# EAGLE board Maya Ayoub Custom Layout v29 (EAGLE 9.7.0)
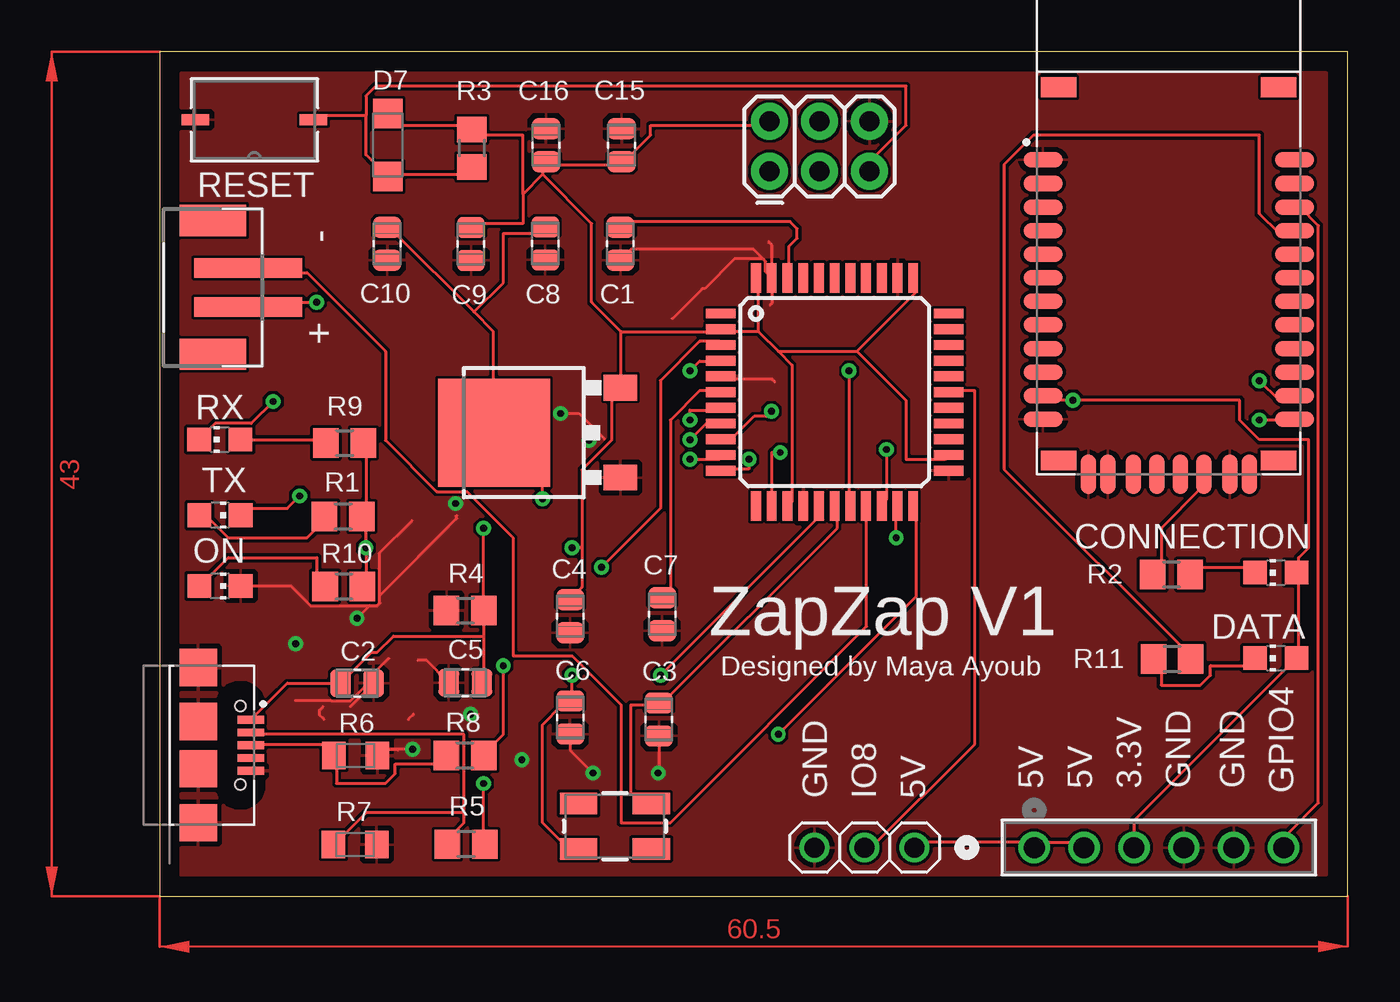
[diagram p0: board, top side]
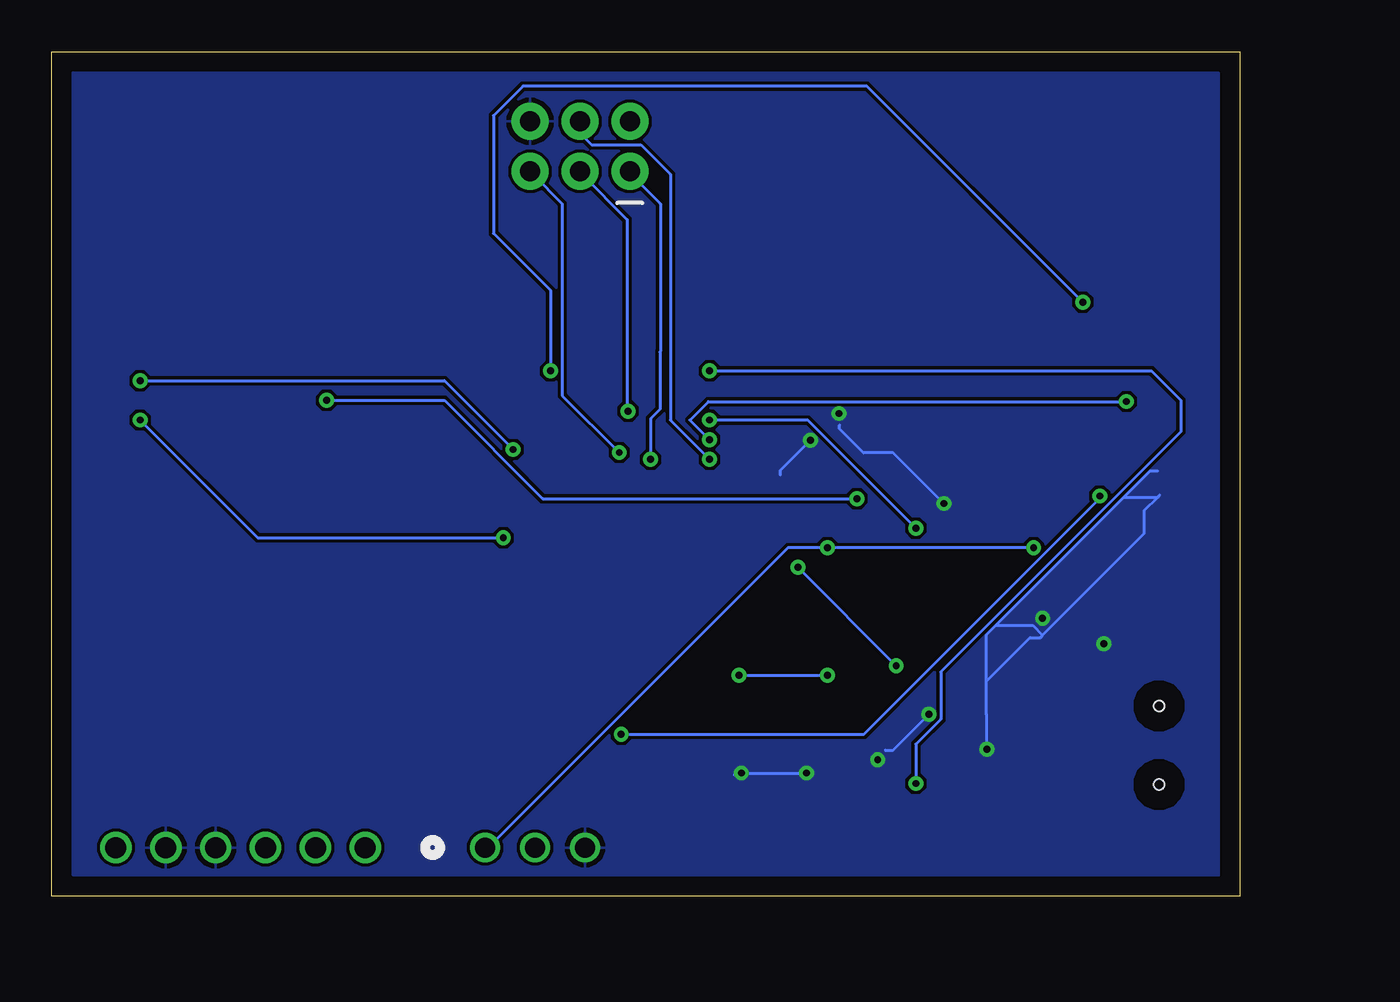
[diagram p1: board, bottom side, seen from below]

Size 60.5 x 43.01 mm. Coordinates in mm from the lower left corner, seen from the top.
Outline: 0,0 60.5,0.01 60.5,43.01 0,43 0,0
Copper layers (1*16): Top 0.035mm / dielectric 1.5mm / Bottom 0.035mm
Design rules "default": minimum track width 6mil, minimum drill 0.35mm, track to track 6mil, track to pad 6mil, pad to pad 6mil, via to via 6mil, smd to smd 6mil, copper to edge 40mil, drill to drill 6mil, minimum pad ring 10mil, minimum via ring 8mil, stop-mask expansion 4mil, vias tented up to drill 0mil, thermal gap 10mil

## Footprints (pad centres in the part's own frame; a part is rotated, then mirrored left to right if it is on the bottom)
CAP_0805 = smd 1.05 x 1.38: 1 -0.84,0; 2 0.84,0
JST-PH-2-SMT = smd 1 x 5.5: 1 -1,-1.8; 2 1,-1.8 | smd 1.6 x 3.4: NC1 -3.4,0; NC2 3.4,0
CHIP-LED0805 = smd 1.2 x 1.2: A 0,-1.05; C 0,1.05
LED-1206 = smd 1.5 x 1.5: + -1.6,0; - 1.6,0
TO252 = smd 1.3 x 1.7: 1 -2.285,-4.22; 2 2.285,-4.22 | smd 5.5 x 5.7: 3 0,2.22
2X3 = drill 1.016 pad 1.88: 1 0,0; 2 0,2.54; 3 2.54,0; 4 2.54,2.54; 5 5.08,0; 6 5.08,2.54
CUI_UJ2-MIBH-G-SMT-TR = smd 0.4 x 1.35: 1 -1.3,2.675; 2 -0.65,2.675; 3 0,2.675; 4 0.65,2.675; 5 1.3,2.675 | smd 1.9 x 1.9: S1 -3.95,0; S2 -1.2,0; S3 1.2,0; S4 3.95,0 | hole 0.55: -2,2.15; 2,2.15
CONN6_061LFBN-RC_SUL = drill 1.067 pad 1.321: 1 0,0; 2 2.54,0; 3 5.08,0; 4 7.62,0; 5 10.16,0; 6 12.7,0
1X03 = drill 1.016: 1 -2.54,0; 2 0,0; 3 2.54,0
R0805 = smd 1.3 x 1.5: 1 -0.95,0; 2 0.95,0
CT/CN0805 = smd 1.2 x 1.4: 1 -1.1,0; 2 1.1,0
SW_PTS636_SK25J_SMTR_LFS_CNK = smd 1.397 x 0.559: 1 -3.006,0; 2 3.006,0
TQFP44 = smd 1.5 x 0.5: 1 -5.8,4; 2 -5.8,3.2; 3 -5.8,2.4; 4 -5.8,1.6; 5 -5.8,0.8; 6 -5.8,0; 7 -5.8,-0.8; 8 -5.8,-1.6; 9 -5.8,-2.4; 10 -5.8,-3.2; 11 -5.8,-4; 23 5.8,-4; 24 5.8,-3.2; 25 5.8,-2.4; 26 5.8,-1.6; 27 5.8,-0.8; 28 5.8,0; 29 5.8,0.8; 30 5.8,1.6; 31 5.8,2.4; 32 5.8,3.2; 33 5.8,4 | smd 0.5 x 1.5: 12 -4,-5.8; 13 -3.2,-5.8; 14 -2.4,-5.8; 15 -1.6,-5.8; 16 -0.8,-5.8; 17 0,-5.8; 18 0.8,-5.8; 19 1.6,-5.8; 20 2.4,-5.8; 21 3.2,-5.8; 22 4,-5.8; 34 4,5.8; 35 3.2,5.8; 36 2.4,5.8; 37 1.6,5.8; 38 0.8,5.8; 39 0,5.8; 40 -0.8,5.8; 41 -1.6,5.8; 42 -2.4,5.8; 43 -3.2,5.8; 44 -4,5.8
XCVR_RN42-I/RM = smd 2 x 0.8: 1 -6.4,6.6; 2 -6.4,5.4; 3 -6.4,4.2; 4 -6.4,3; 5 -6.4,1.8; 6 -6.4,0.6; 7 -6.4,-0.6; 8 -6.4,-1.8; 9 -6.4,-3; 10 -6.4,-4.2; 11 -6.4,-5.4; 12 -6.4,-6.6; 13 6.4,-6.6; 14 6.4,-5.4; 15 6.4,-4.2; 16 6.4,-3; 17 6.4,-1.8; 18 6.4,-0.6; 19 6.4,0.6; 20 6.4,1.8; 21 6.4,3; 22 6.4,4.2; 23 6.4,5.4; 24 6.4,6.6 | smd 0.8 x 2: 28 3.1,-9.4; 29 -3.1,-9.4; 30 4.1,-9.4; 31 1.8,-9.4; 32 0.6,-9.4; 33 -0.6,-9.4; 34 -1.8,-9.4; 35 -4.1,-9.4 | smd 1.8 x 1: S1 -5.6,-8.7; S2 5.6,-8.7; S3 5.6,10.3; S4 -5.6,10.3
CRYSTAL-SMD-5X3.2-4PAD = smd 1.9 x 1.1: 1 -1.85,-1.15; 2 1.85,-1.15; 3 1.85,1.15; 4 -1.85,1.15

## Placement (x,y rotation side)
C1  0.1uF 0805  [CAP_0805]  23.46,33.23 90 top
C2  22uF 0805  [CAP_0805]  10.06,10.86 180 top
C3  18pF 0805  [CAP_0805]  25.42,9.01 270 top
C4  1uF 0805  [CAP_0805]  20.9,14.26 90 top
C5  0.1uF 0805  [CAP_0805]  15.56,10.88 0 top
C6  18pF 0805  [CAP_0805]  20.9,9.11 270 top
C7  1uF 0805  [CAP_0805]  25.59,14.37 270 top
C8  22uF 0805  [CAP_0805]  19.64,33.24 90 top
C9  10uF 0805  [CAP_0805]  15.85,33.21 90 top
C10  0.1uF 0805  [CAP_0805]  11.58,33.22 90 top
C15  0.1uF 0805  [CAP_0805]  23.52,38.24 90 top
C16  0.1uF 0805  [CAP_0805]  19.67,38.24 90 top
CN1  [JST-PH-2-SMT]  2.72,31 90 top
CONNECTION  GREEN 0805  [CHIP-LED0805]  56.83,16.48 90 top
D7  SMD-DIODE-SWITCHING-75V-150MA(D1206)  [LED-1206]  11.63,38.25 90 top
DATA  RED 0805  [CHIP-LED0805]  56.83,12.13 90 top
IC1  LM1117DT-3.3  [TO252]  19.24,23.61 90 top
J1  AVR_SPI_PROG_3X2PTH  [2X3]  31.06,36.91 0 top
J2  UJ2-MIBH-G-SMT-TR  [CUI_UJ2-MIBH-G-SMT-TR]  1.97,7.7 270 top
J3  PPTC061LFBN-RCCONN6_061LFBN-RC_SUL  [CONN6_061LFBN-RC_SUL]  44.53,2.49 0 top
JP1  [1X03]  35.89,2.49 0 top
ON  ONGREEN 0805  [CHIP-LED0805]  3.08,15.8 270 top
R1  1k 0805  [R0805]  9.34,19.34 0 top
R2  470Ohms 0805  [R0805]  51.52,16.39 0 top
R3  10kOhms 0805  [R0805]  15.89,38.09 270 top
R4  10k 0805  [R0805]  15.56,14.56 0 top
R5  22Ohms 0805  [R0805]  15.6,2.66 180 top
R6  VARISTORCN0805  [CT/CN0805]  9.98,7.17 180 top
R7  VARISTORCN0805  [CT/CN0805]  9.96,2.64 180 top
R8  22Ohms 0805  [R0805]  15.55,7.16 180 top
R9  1k 0805  [R0805]  9.42,23.08 0 top
R10  1k 0805  [R0805]  9.38,15.78 0 top
R11  470Ohms 0805  [R0805]  51.55,12.08 180 top
RESET  SPST  [SW_PTS636_SK25J_SMTR_LFS_CNK]  4.82,39.53 180 top
RX  RXYellow  [CHIP-LED0805]  3.06,23.26 90 top
TX  TXYellow  [CHIP-LED0805]  3.08,19.4 270 top
U1  32U4  [TQFP44]  34.37,25.67 0 top
U2  RN42-I/RM  [XCVR_RN42-I/RM]  51.38,30.89 0 top
Y1  16MHz  [CRYSTAL-SMD-5X3.2-4PAD]  23.18,3.57 0 top

## Library data of the parts
C1-C10 C15 C16 = Resistor_Capacitor; CREATED_BY: PCBLayout.com; DIGIKEY_PART_NUMBER: 311-1140-2-ND; MANUFACTURER: Yageo; MPN: CC0805KRX7R9BB104; PACKAGE: SMD 0805
CN1 JP1 = adafruit
CONNECTION DATA ON RX TX = led
D7 = SMD-DIODE-SWITCHING-75V-150MA_D1206_; AVAILABILITY: Warning; DESCRIPTION: Diode Standard 100V 150mA Surface Mount 1206; MF: Bourns; MP: CD1206-S01575; PACKAGE: 1206 Bourns; PRICE: None
IC1 = lm1117_10; MF: Texas Instruments; MPN: LM1117DT-3.3; OC_FARNELL: 1469048; OC_NEWARK: 41K3430
J1 = SparkFun-Connectors
J2 = UJ2-MIBH-G-SMT-TR; CUI_PURCHASE_URL: https://www.cuidevices.com/product/interconnect/connectors/usb-connectors/uj2-mibh-g-smt-tr?utm_source=snapeda.com&utm_medium=referral&utm_campaign=snapedaBOM; DESCRIPTION: Micro B, USB 2.0, 1.8 A, Right Angle, Surface Mount (SMT), USB Receptacle; DIGI-KEY_PART_NUMBER: 2223-UJ2-MIBH-G-SMT-TRCT-ND; MF: CUI Devices; MP: UJ2-MIBH-G-SMT-TR; PACKAGE: None; PURCHASE-URL: https://pricing.snapeda.com/search/part/UJ2-MIBH-G-SMT-TR/?ref=eda
J3 = 2021-10-12_06-33-55_Library; COPYRIGHT: Copyright (C) 2021 Ultra Librarian. All rights reserved.; DIGI-KEY_PART_NUMBER_1: S7004-ND; MANUFACTURER_PART_NUMBER: PPTC061LFBN-RC; MFR_NAME: Sullins
R1-R5 R8-R11 = rcl; SPICEPREFIX: R
R6 R7 = varistor
RESET = 2021-10-08_06-17-12_Library; COPYRIGHT: Copyright (C) 2021 Ultra Librarian. All rights reserved.; DIGI-KEY_PART_NUMBER_1: CKN12326-2-ND; DIGI-KEY_PART_NUMBER_2: CKN12326-1-ND; DIGI-KEY_PART_NUMBER_3: CKN12326-6-ND; MANUFACTURER_PART_NUMBER: PTS636 SK25J SMTR LFS; MFR_NAME: C&K
U1 = SparkFun-IC-Microcontroller; PROD_ID: IC-11161; SPICEPREFIX: X
U2 = RN42-I_RM; AVAILABILITY: In Stock; DESCRIPTION: Bluetooth Bluetooth v2.1 +EDR Transceiver Module 2.4GHz Integrated, Trace Surface Mount; MF: Microchip; MP: RN42-I/RM; PACKAGE: None; PRICE: None; PURCHASE-URL: https://pricing.snapeda.com/search/part/RN42-I/RM/?ref=eda
Y1 = SparkFun-Clocks; PROD_ID: XTAL-08218; SF_ID: COM-00094

## Nets
A0: U1.36
A1: U1.37
A2: U1.38
A3: U1.39
A4: U1.40
A5: U1.41
D2/SDA: CN1.2 U1.19
D3/SCL: CN1.1 U1.18
D4: U1.25
D5*: U1.31
D6*: U1.27
D7: U1.1
GND: C1.1 C2.1 C3.2 C4.1 C5.1 C6.2 C7.2 C8.1 C9.1 C10.1 C15.2 C16.2 IC1.1 J1.6 J2.5 J2.S1 J2.S2 J2.S3 J2.S4 J3.4 J3.5 JP1.1 ON.C R4.1 R6.1 R7.1 RESET.2 U1.5 U1.15 U1.23 U1.35 U1.43 U2.1 U2.12 U2.28 U2.29 U2.35
GPIO4: J3.6 U2.22
IO8: JP1.2 U1.28
IO9*: U1.29
IO10*: U1.30
IO11*: U1.12
IO12: U1.26
IO13*: U1.32
MISO: J1.1 U1.11
MOSI: J1.4 U1.10
N$1: J2.2 R5.2 R7.2
N$2: J2.3 R6.2 R8.2
N$3: R2.1 U2.31
N$4: R11.1 U2.21
N$5: C1.2 U1.42
N$6: C7.1 U1.6
N$7: DATA.C R11.2
N$8: CONNECTION.C R2.2
N$10: R1.1 TX.A
N$11: ON.A R10.1
N$12: R9.1 RX.A
RD+: R5.1 U1.4
RD-: R8.1 U1.3
RESET: D7.+ J1.5 R3.2 RESET.1 U1.13
RXLED: RX.C U1.8
SCK: J1.3 U1.9
TXLED: TX.C U1.22
UART_RX: U1.21 U2.13
UART_TX: U1.20 U2.14
VCC: C4.2 C9.2 C15.1 C16.1 D7.- IC1.2 J1.2 J3.1 J3.2 JP1.3 R1.2 R3.1 R9.2 R10.2 U1.2 U1.14 U1.24 U1.34 U1.44
VCC_2: C8.2 C10.2 CONNECTION.A DATA.A IC1.3 J3.3 U2.11
VUSB: C2.2 C5.2 J2.1 R4.2 U1.7
XTAL1: C3.1 U1.17 Y1.3
XTAL2: C6.1 U1.16 Y1.1

## Tracks (layer width: path | path; a pad name or v marks a point on that pad's centre or on a via)
D2/SDA
  Top 0.152: U1.19 36,19.75 36,13.75 26,3.75 23.5,3.75 23.5,9.75 21,12.25 18,12.25 18,18.25 15.64,20.61 14.1,20.61 11.5,23.21 11.5,27.75 7.5,31.75 5,31.75 CN1.2
D3/SCL  (via drill 0.35)
  Top 0.152: v8,30.25 5,30.25 CN1.1 | v35.11,26.75 35.11,19.93 U1.18
  Bottom 0.152: v8,30.25 19,41.25 36.5,41.25 38,39.75 38,33.75 35.11,30.86 v35.11,26.75
GND  (via drill 0.35)
  Top 0.152: R6.1 11.36,7.46 12.12,7.46 | 11.35,10.41 C2.1 | 12.92,9.28 12.66,9.01 | v12.89,7.5 12.87,7.52 11.71,7.52 | 8.32,9.66 8.14,9.49 8.14,9.23 8.37,9.01 | 9.71,9.66 C2.1 | U1.43 31.17,33.17 31.01,33.33 | 31.33,26.2 31.18,26.34 28.7,26.34 U1.5 | U1.43 31.17,30.2 31.08,30.11 | 14.26,10.88 C5.1 13.59,12.01 13.14,12.01 | 30.71,32.45 30.23,32.94 24.01,32.94 C1.1 | 30.71,32.45 30.85,32.31 30.85,31.79 U1.43 | C6.2 20.9,7.44 v22.06,6.28 | C3.2 25.42,6.32 v25.39,6.28 | 11.07,14.8 11.2,14.94 | ON.C 6.68,15.8 7.68,14.8 11.07,14.8 | 12.84,19.13 11.2,17.49 11.2,14.94 | v15.84,9.28 16.19,9.28 16.2,9.27 | C2.1 10.61,10.86 9.69,9.94 8.75,9.94 8.72,9.96 6.91,9.96 | C2.1 10.9,11.36 11.66,12.12 | 26.11,29.41 27.64,30.94 27.76,30.94 29.27,32.45 30.71,32.45 | 15.13,19.39 15.13,19.24 11.2,15.31 11.2,14.94 | v10.04,14.15 10.69,14.8 11.07,14.8 | 11.07,14.8 11.2,14.94 | 22.65,23.3 21.35,24.59 v20.41,24.59
  Bottom 0.152: v12.89,7.5 12.89,9.25 12.9,9.26 | 12.9,9.26 12.92,9.28 | 25.76,6.18 25.66,6.28 v25.39,6.28 v22.06,6.28 | 12.9,9.26 12.9,10.95 | v15.84,9.28 17.66,7.45 18.07,7.45 | 12.9,10.95 12.9,13.33 12.43,13.8 | 12.43,13.8 5.9,20.33 | 5.9,20.33 5.83,20.39 5.11,21.12 4.57,21.66 4.19,21.66 | 4.18,20.33 4.86,19.65 4.86,18.48 10.04,13.3 | 5.9,20.33 4.18,20.33 | 4.18,20.33 4.09,20.42 | 12.9,10.95 10.68,13.17 10.17,13.17 10.04,13.3 | 12.43,13.8 10.55,13.8 10.04,13.3 | v15.07,20 17.65,22.58 19.16,22.58 20.38,23.81 20.38,23.99 | v21.87,23.21 23.41,21.68 23.41,21.45
  other vias: 18.44,6.97 6.92,12.87
  pour Top: 60.04,42.79 60.04,0.94 60.58,0.4 0.27,0.4 0.28,42.79
  pour Bottom: 60.33,42.88 60.33,0.53 0.72,0.53 0.36,0.17 0.36,42.75
GPIO4
  Top 0.152: J3.6 57.5,2.75 57.5,3.25 59.01,4.76 59.01,34.15 58.07,35.09 U2.22
IO8
  Top 0.152: U1.28 40.5,25.75 41.5,25.75 41.5,7.75 36,2.25 JP1.2
MISO  (via drill 0.35)
  Top 0.152: v30,22.25 30,21.75 29,21.75 U1.11
  Bottom 0.152: J1.1 31,36.75 29.5,35.25 29.5,27.75 29.53,27.72 29.53,24.8 30,24.33 v30,22.25
MOSI  (via drill 0.35)
  Top 0.152: v27,22.25 28.5,22.25 U1.10
  Bottom 0.152: v27,22.25 29,24.25 29,36.75 30.5,38.25 33,38.25 34,39.25 J1.4
N$1
  Top 0.152: 15.5,4.25 15.5,3.75 15,3.25 15,2.75 R5.2 | 15.5,4.25 15.5,8.25 5,8.25 J2.2 | 15.5,4.25 10.5,4.25 9,2.75 R7.2
N$2
  Top 0.152: J2.3 5,7.75 8.5,7.75 8.5,7.25 R6.2 9,6.75 9,5.75 11.5,5.75 12,6.25 12,6.75 14.5,6.75 R8.2
N$3
  Top 0.152: R2.1 51,16.75 51,18.75 53,20.75 53,21.25 U2.31
N$4
  Top 0.152: R11.1 52.5,12.25 43,21.75 43,37.25 44.5,38.75 56,38.75 56,34.75 57,33.75 57.5,33.75 U2.21
N$5
  Top 0.152: U1.42 32.06,31.56 32.06,33.1 32.45,33.5 32.45,34 32.1,34.35 23.75,34.35 C1.2
N$6
  Top 0.152: C7.1 26,15.25 26,24.25 27.5,25.75 28.5,25.75 U1.6
N$7
  Top 0.152: DATA.C 55.5,11.75 53.5,11.75 53.5,11.25 53,10.75 51,10.75 51,11.75 R11.2
N$8
  Top 0.152: CONNECTION.C 55.5,16.75 52.5,16.75 R2.2
N$10
  Top 0.152: TX.A 2.5,19.25 3.5,18.25 7.5,18.25 8,18.75 8,19.25 R1.1
N$11
  Top 0.152: ON.A 2.5,16.25 3.5,17.25 8,17.25 8,16.25 R10.1
N$12
  Top 0.152: RX.A 4.5,23.25 8,23.25 R9.1
RD+  (via drill 0.35)
  Top 0.152: v16.5,5.75 16.5,2.75 R5.1 | v27,26.75 27.5,27.25 28.5,27.25 U1.4
  Bottom 0.152: v27,26.75 4.5,26.75 3,25.25 3,23.66 15.23,11.43 15.23,9.02 16.5,7.76 v16.5,5.75
RD-  (via drill 0.35)
  Top 0.152: v17.5,11.75 17.5,8.25 16.5,7.25 R8.1 | v22.5,16.75 25.5,19.75 25.5,26.25 27.5,28.25 28.5,28.25 U1.3
  Bottom 0.152: v22.5,16.75 v17.5,11.75
RESET  (via drill 0.35)
  Top 0.152: 10.5,39.75 8,39.75 RESET.1 | 10.5,39.75 10.5,37.75 11.5,36.75 D7.+ 12,36.75 15.5,36.75 R3.2 | 10.5,39.75 10.5,40.75 11,41.25 38,41.25 38,39.25 36.5,37.75 36.5,37.25 J1.5 | v31.6,22.6 31.17,22.6 U1.13
  Bottom 0.152: J1.5 36,36.75 34.5,35.25 34.5,25.5 v31.6,22.6
RXLED  (via drill 0.35)
  Top 0.152: v27,23.25 28,24.25 28.5,24.25 U1.8 | v5.77,25.19 4.67,24.09 2.84,24.09 RX.C
  Bottom 0.152: v5.77,25.19 27.06,25.19 28,24.25 v27,23.25
SCK  (via drill 0.35)
  Top 0.152: U1.9 29,23.25 29.07,23.25 30.26,24.44 30.89,24.44 v31.15,24.7
  Bottom 0.152: v31.15,24.7 31.2,24.75 31.2,34.45 33.5,36.75 J1.3
TXLED  (via drill 0.35)
  Top 0.152: v31.5,8.25 38.5,15.25 38.5,19.75 U1.22 | TX.C 4.5,19.75 6.5,19.75 v7.13,20.38
  Bottom 0.152: v31.5,8.25 19.14,8.25 7.13,20.26 v7.13,20.38
UART_RX  (via drill 0.35)
  Top 0.152: v37.5,18.25 37.5,19.75 U1.21 | v56,24.25 57.5,24.25 U2.13
  Bottom 0.152: v37.5,18.25 50,18.25 v56,24.25
UART_TX  (via drill 0.35)
  Top 0.152: v37,22.75 37,20.25 U1.20 | v56,26.25 57,25.25 57.5,25.25 U2.14
  Bottom 0.152: v37,22.75 40.5,26.25 v56,26.25
VCC  (via drill 0.35)
  Top 0.152: D7.- 12,39.75 12,39.25 15.5,39.25 R3.1 16,38.75 18.5,38.75 18.5,35.75 | 18.5,35.75 18.5,34.25 16,34.25 C9.2 | 19.5,36.75 18.5,35.75 | 19.5,36.75 19.5,37.25 C16.1 20,37.25 23.5,37.25 C15.1 24,37.75 25,38.75 25,39.25 31,39.25 J1.2 | 30.5,28.75 29,28.75 U1.2 28.5,28.75 23.5,28.75 | 30.5,28.75 30.5,31.25 U1.44 | 30.5,28.75 31.5,27.75 | 35.5,27.75 38.5,30.75 38.5,31.25 U1.34 | 31.5,27.75 35.5,27.75 | 35.5,27.75 38,25.25 38,22.25 40,22.25 U1.24 | JP1.3 38.5,2.75 44.5,2.75 J3.1 45,2.75 47,2.75 J3.2 | R9.2 10.5,22.75 10.5,19.75 R1.2 10.5,19.25 v10.5,17.75 10.5,16.25 R10.2 | 21.5,17.75 21.5,15.75 21,15.25 C4.2 | 21.5,17.75 v21,17.75 | 23.5,28.75 23.5,26.25 IC1.2 23,25.75 23,23.22 21.5,21.72 21.5,17.75 | 19.5,36.75 22,34.25 22,30.25 23.5,28.75 | 31.5,27.75 32.21,27.04 32.21,20.11 U1.14
  Bottom 0.152: v10.5,17.75 v21,17.75 23,17.75 38,2.75 JP1.3
VCC_2  (via drill 0.35)
  Top 0.152: 16,29.75 17,28.75 17,23.75 IC1.3 17.5,23.25 19.5,21.25 v19.5,20.25 | 16,29.75 12,33.75 C10.2 | 16,29.75 17.5,31.25 17.5,33.75 19.5,33.75 C8.2 | U2.11 45,25.25 v46.5,25.25 55,25.25 55,24.25 56,23.25 58.5,23.25 58.5,17.75 58,17.25 58,16.75 CONNECTION.A 58,16.25 58,12.25 DATA.A 49.61,3.86 J3.3
  Bottom 0.152: v19.5,20.25 35.5,20.25 40.5,25.25 v46.5,25.25
VUSB  (via drill 0.35)
  Top 0.152: 16.5,13.25 16.5,14.25 R4.2 16.5,14.75 v16.5,18.75 | 16.5,13.25 16.5,11.25 C5.2 | v27,24.25 27,24.75 28.5,24.75 U1.7 | J2.1 6.5,10.86 C2.2 10.79,12.43 11.08,12.43 11.9,13.25 16.5,13.25
  Bottom 0.152: v27,24.25 22,24.25 v16.5,18.75
XTAL1
  Top 0.152: Y1.3 25,4.25 24,5.25 24,9.75 25,9.75 C3.1 25.5,9.75 34.5,18.75 34.5,19.75 U1.17
XTAL2  (via drill 0.35)
  Top 0.152: Y1.1 21,2.25 19.5,3.75 19.5,8.75 20.5,9.75 C6.1 21,10.25 v21,11.25 | v25.5,11.25 33.5,19.25 33.5,19.75 U1.16
  Bottom 0.152: v25.5,11.25 v21,11.25
(copper drawn outside any net)
  shapes: Top area x2

## Text on the board
tNames: ZapZap V1 | Designed by Maya Ayoub | GND | IO8 | 5V | 5V | 5V | 3.3V | GND | GND | GPIO4